# Allegro board FULLADDER.brd
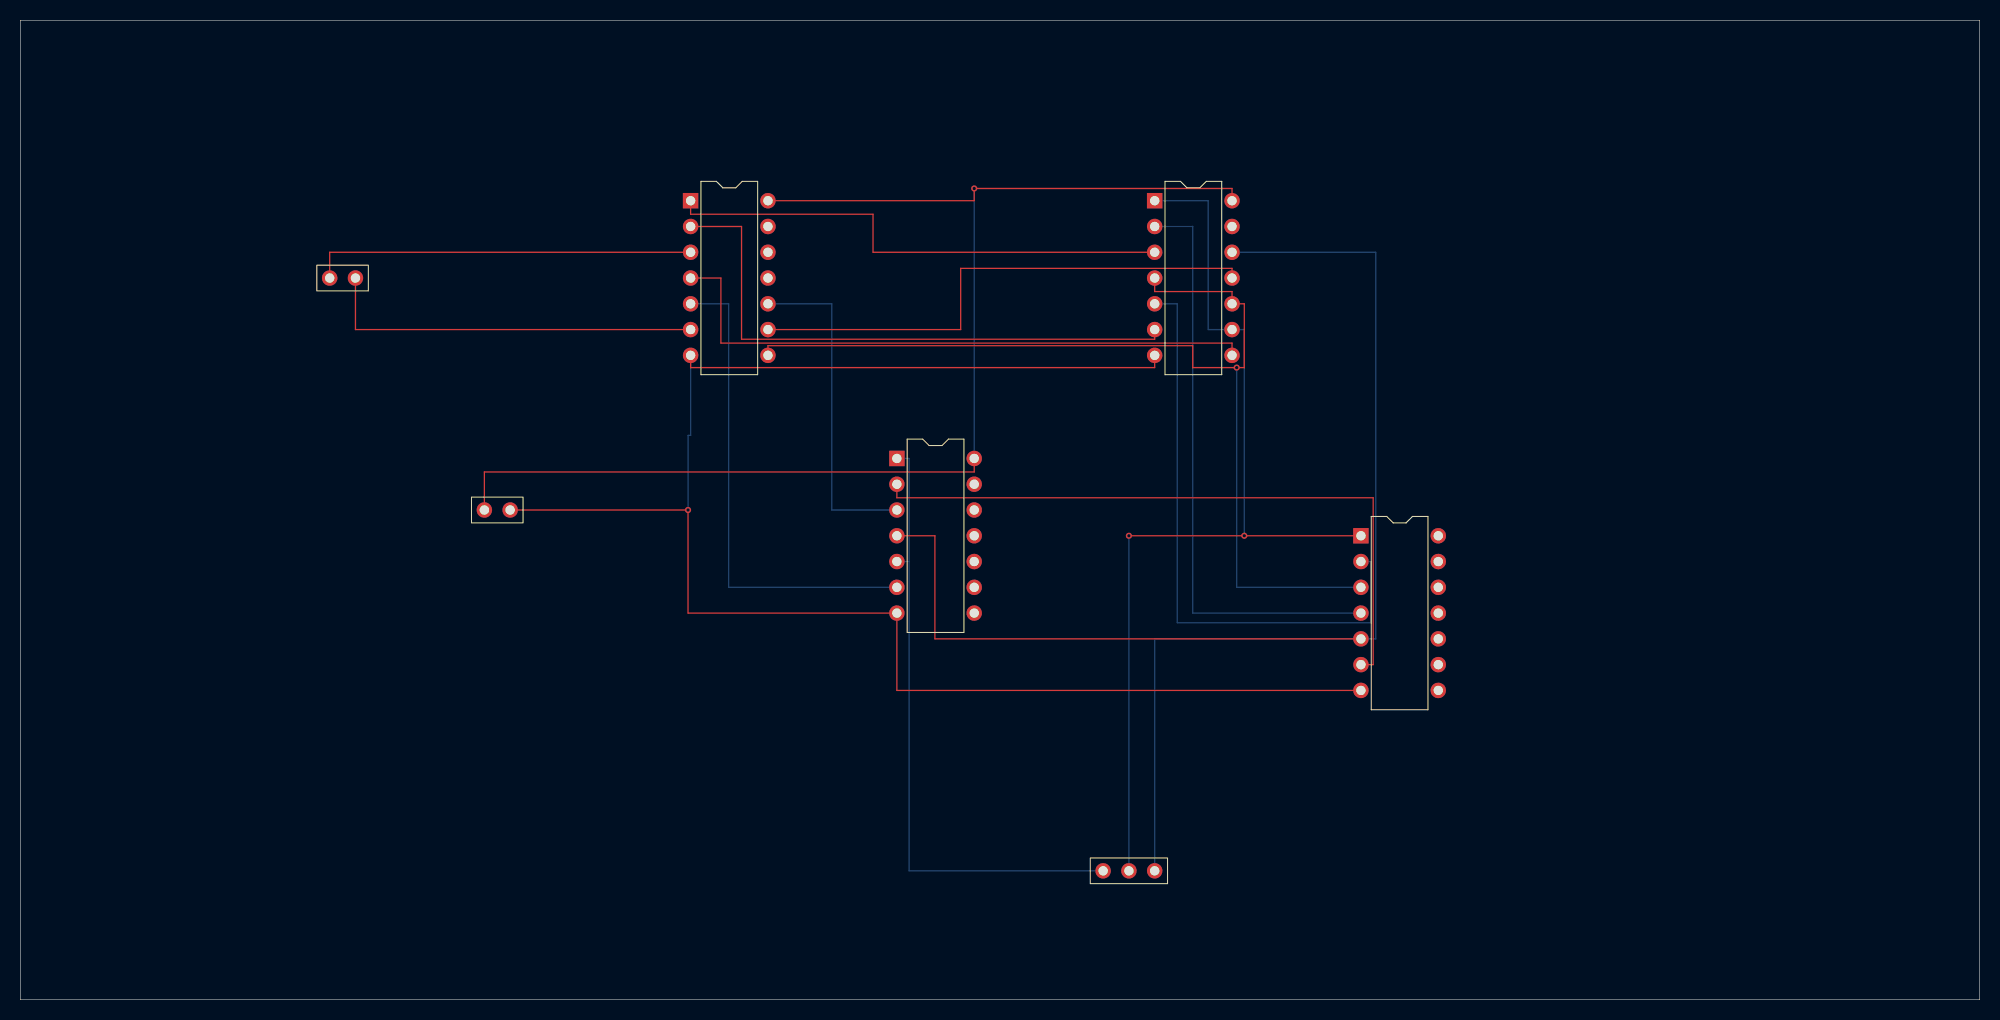
[diagram p0: board, top side]
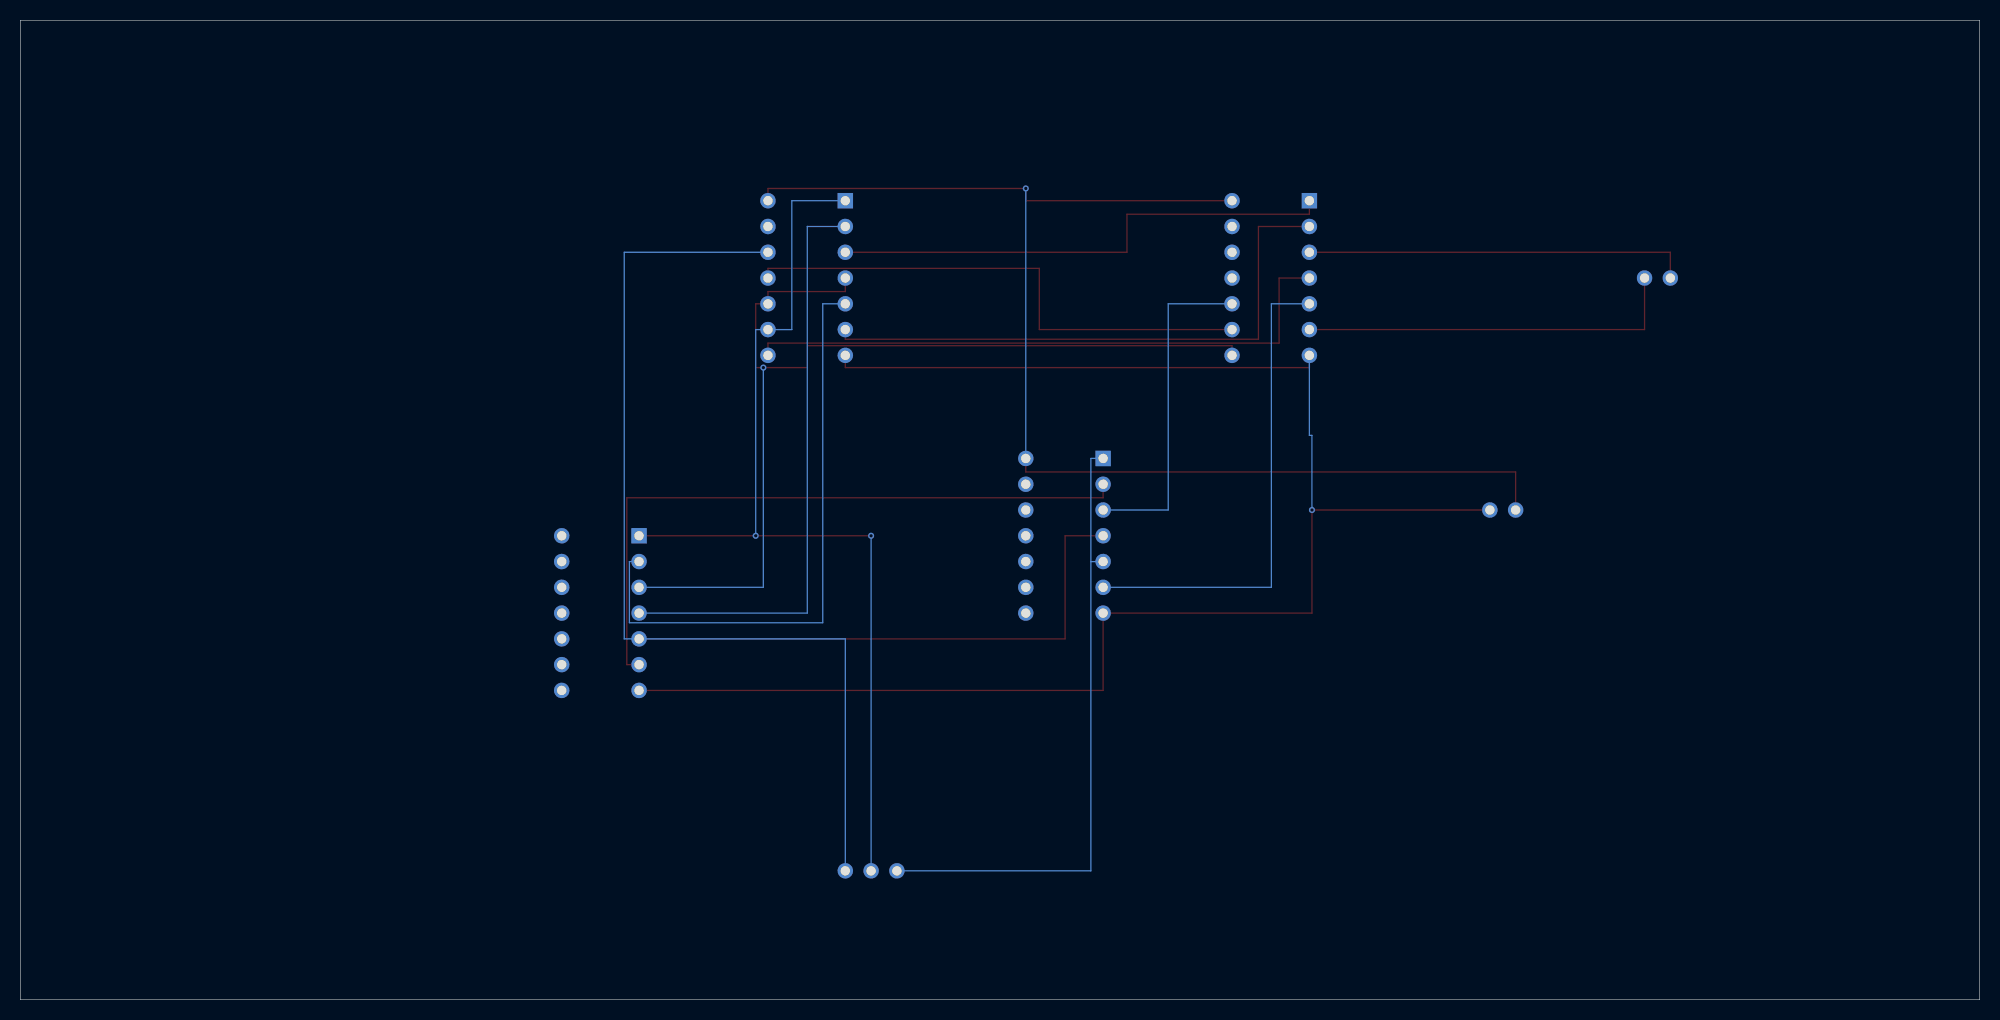
[diagram p1: board, bottom side, seen from below]

Outline 193.04 x 96.52 mm; copper layers: TOP, BOTTOM. Coordinates in mm from the lower left corner of the outline.
Outline path: 0,96.52 0,0 193.04,0 193.04,96.52 0,96.52

## Design rules (mm)
constraint set DEFAULT: min track width 0.127

## Placement (name value [footprint] x y rotation side)
J1  CON2  [JUMPER2]  30.48 71.12 0 top
J2  CON2  [JUMPER2]  45.72 48.26 0 top
J3  CON3  [JUMPER3]  106.68 12.7 0 top
U1  74AC08  [DIP14_3]  111.76 78.74 0 top
U2  74AC32  [DIP14_3]  66.04 78.74 0 top
U3  74AC04  [DIP14_3]  132.08 45.72 0 top
U4  74AC08  [DIP14_3]  86.36 53.34 0 top

## Library data of the parts
J1 J2 = CON2: User Part Number: ***
J3 = CON3: User Part Number: ***
U1 U4 = 74AC08: Tolerance: ***; User Part Number: ***
U2 = 74AC32: Tolerance: ***; User Part Number: ***
U3 = 74AC04: Tolerance: ***; User Part Number: ***

## Footprints (pads in the part's own frame, mm; a bottom-side part is the same pattern mirrored in y, then rotated)
DIP14_3
  rect 1.524x1.524 hole 0.914: 1(0,0)
  round 1.524 hole 0.914: 2(0,-2.54) 3(0,-5.08) 4(0,-7.62) 5(0,-10.16) 6(0,-12.7) 7(0,-15.24) 8(7.62,-15.24) 9(7.62,-12.7) 10(7.62,-10.16) 11(7.62,-7.62) 12(7.62,-5.08) 13(7.62,-2.54) 14(7.62,0)
JUMPER2
  round 1.524 hole 0.914: 1(0,0) 2(2.54,0)
JUMPER3
  round 1.524 hole 0.914: 1(0,0) 2(2.54,0) 3(5.08,0)

## Nets
VCC: J2.1 U1.14 U2.14 U3.14 U4.14
0: J2.2 U1.7 U2.7 U3.7 U4.7
CARRY: J3.2 U1.1 U1.9 U3.1
CARRY_OUT: J1.2 U2.6
SUM: J1.1 U2.3
X: J3.3 U1.12 U3.5 U4.4
Y: J3.1 U3.9 U4.1 U4.5
N00314: U1.3 U2.1
N00329: U1.6 U2.2
N00345: U1.8 U2.4
N00353: U1.4 U1.10 U2.8 U3.3
N00377: U1.5 U3.2
N00443: U1.2 U3.4
N02897: U1.11(Y) U2.9
N02905: U1.13 U3.8
N02983: U2.10 U4.3
N02991: U3.6 U4.2
N03079: U2.5 U4.6

Pads without a net: U2 11 12 13; U3 10 11 12 13; U4 8 9 10 11 12 13

## Via types
v1: diameter 0.61, hole 0.33, TOP to BOTTOM, 5 vias

## Routing (per net, layer and track width the routed paths; a pad name or vN(x,y) marks a point on that pad's centre or on a via; arc(x,y) is an arc through that point)
VCC: length 128.1
  TOP w0.127: J2.1 45.72,52.01 93.98,52.01 U4.14 ; U2.14 93.98,78.74 v1(93.98,79.95) 119.38,79.95 U1.14
  BOTTOM w0.127: v1(93.98,79.95) U4.14
0: length 165.2
  TOP w0.127: U2.7 66.04,62.29 111.76,62.29 U1.7 ; J2.2 v1(65.79,48.26) 65.79,38.1 U4.7 86.36,30.48 U3.7
  BOTTOM w0.127: v1(65.79,48.26) 65.79,55.61 66.04,55.61 U2.7
CARRY: length 97.7
  TOP w0.127: v1(109.22,45.72) v1(120.59,45.72) U3.1
  BOTTOM w0.127: U1.1 117.03,78.74 117.03,66.04 U1.9 120.59,66.04 v1(120.59,45.72) ; J3.2 v1(109.22,45.72)
CARRY_OUT: length 38.1
  TOP w0.127: J1.2 33.02,66.04 U2.6
SUM: length 38.1
  TOP w0.127: U2.3 30.48,73.66 J1.1
X: length 152.8
  TOP w0.127: U3.5 90.11,35.56 90.11,45.72 U4.4
  BOTTOM w0.127: J3.3 111.76,35.56 U3.5 133.54,35.56 133.54,73.66 U1.12
Y: length 62.2
  BOTTOM w0.127: 87.57,43.18 87.57,53.34 U4.1 ; 87.57,43.18 U4.5 ; 87.57,43.18 87.57,12.7 J3.1
N00314: length 50.8
  TOP w0.127: U1.3 84.01,73.66 84.01,77.41 66.04,77.41 U2.1
N00329: length 57.8
  TOP w0.127: U1.6 111.76,65.09 71.06,65.09 71.06,76.2 U2.2
N00345: length 61
  TOP w0.127: U1.8 119.38,64.71 69.02,64.71 69.02,71.12 U2.4
N00353: length 101.6
  TOP w0.127: U2.8 73.66,64.45 115.51,64.45 115.51,62.29 v1(119.84,62.29) 120.59,62.29 120.59,68.58 U1.10 119.38,69.79 111.76,69.79 U1.4
  BOTTOM w0.127: v1(119.84,62.29) 119.84,40.64 U3.3
N00377: length 59.7
  BOTTOM w0.127: U3.2 133.03,43.18 133.03,37.15 113.98,37.15 113.98,68.58 U1.5
N00443: length 58.4
  BOTTOM w0.127: U1.2 115.51,76.2 115.51,38.1 U3.4
N02897: length 52.7
  TOP w0.127: U2.9 92.65,66.04 92.65,72.07 119.38,72.07 U1.11
N02983: length 33
  BOTTOM w0.127: U2.10 79.95,68.58 79.95,48.26 U4.3
N02991: length 65.9
  TOP w0.127: U3.6 133.29,33.02 133.29,49.47 86.36,49.47 U4.2
N03079: length 48.3
  BOTTOM w0.127: U2.5 69.79,68.58 69.79,40.64 U4.6
